# Altium PCB 电源控制板.PcbDoc
Units mm, origin at the board's own origin, x right, y up, seen from the top; angles counter-clockwise.
Board outline 96.52 x 68.58 mm, 2 copper layers (Top Layer, Bottom Layer), stack 0.533 mm thick; 40 components, 30 nets, 215 pads, 30 vias.
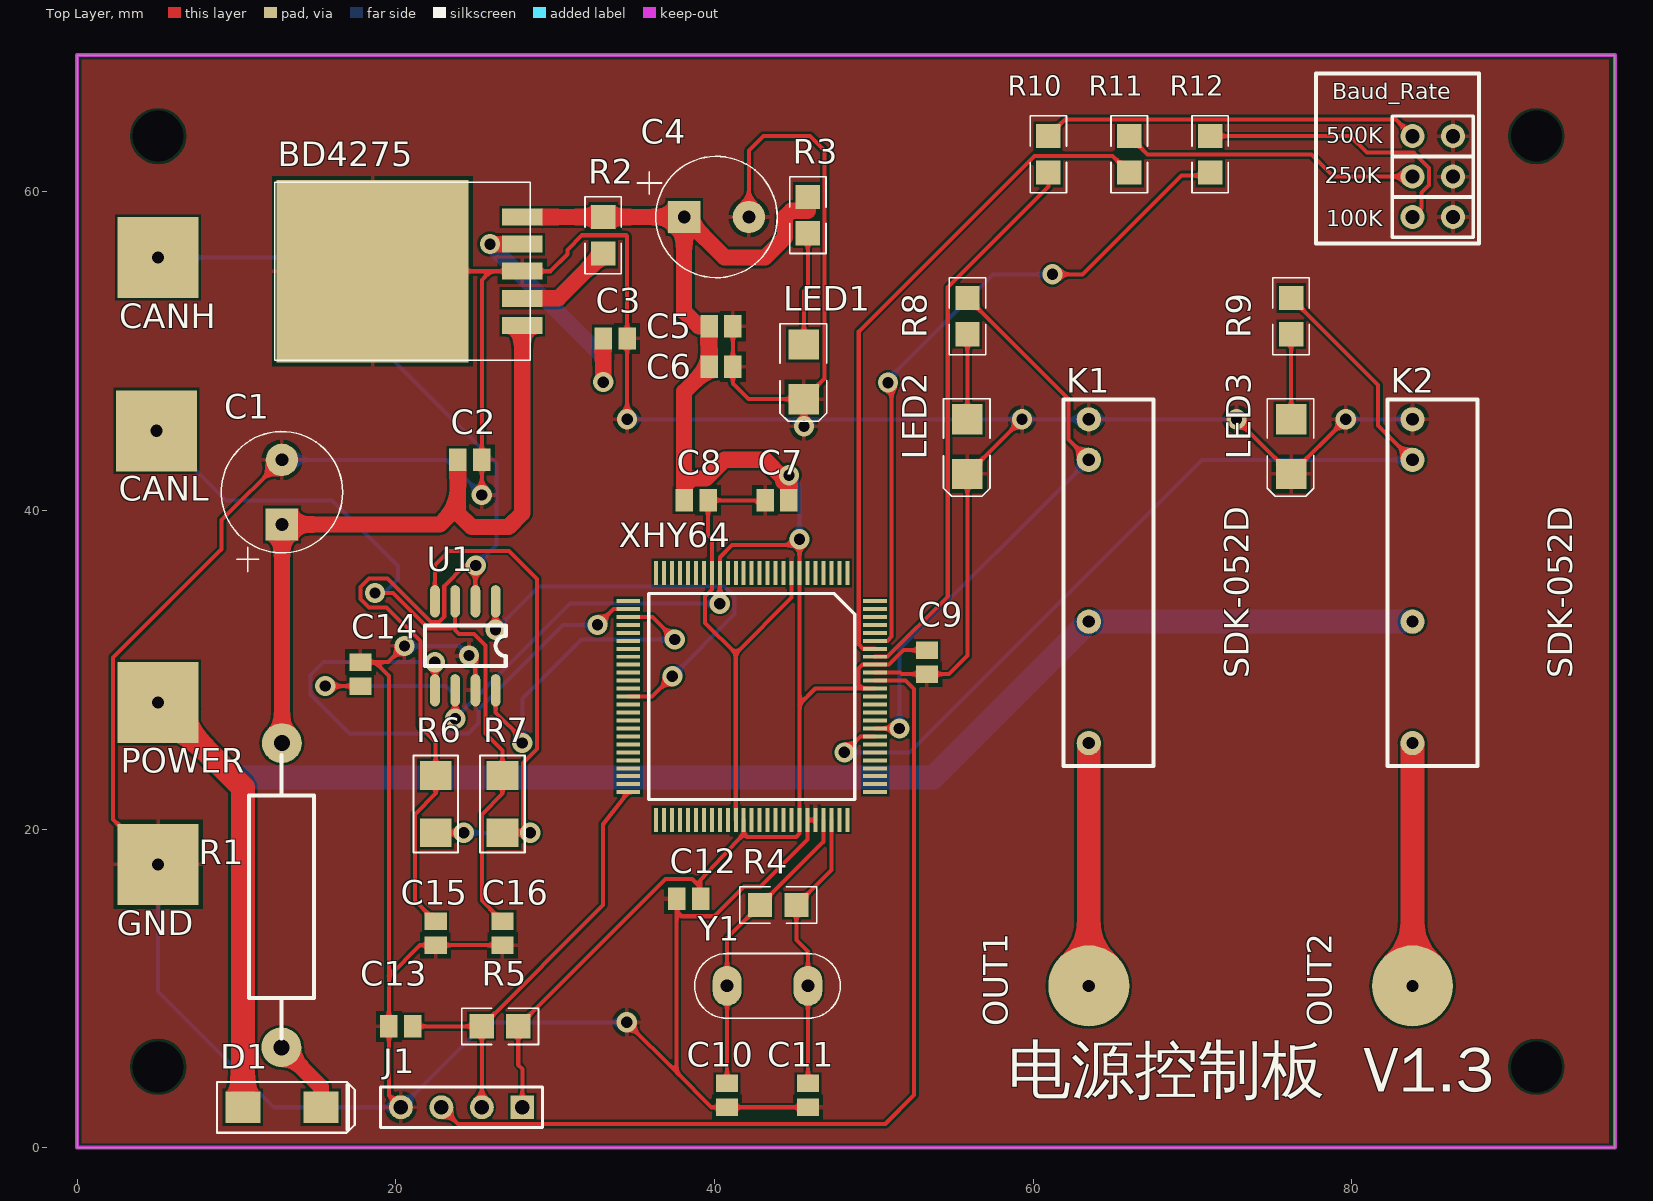
[diagram p0: Top Layer view]
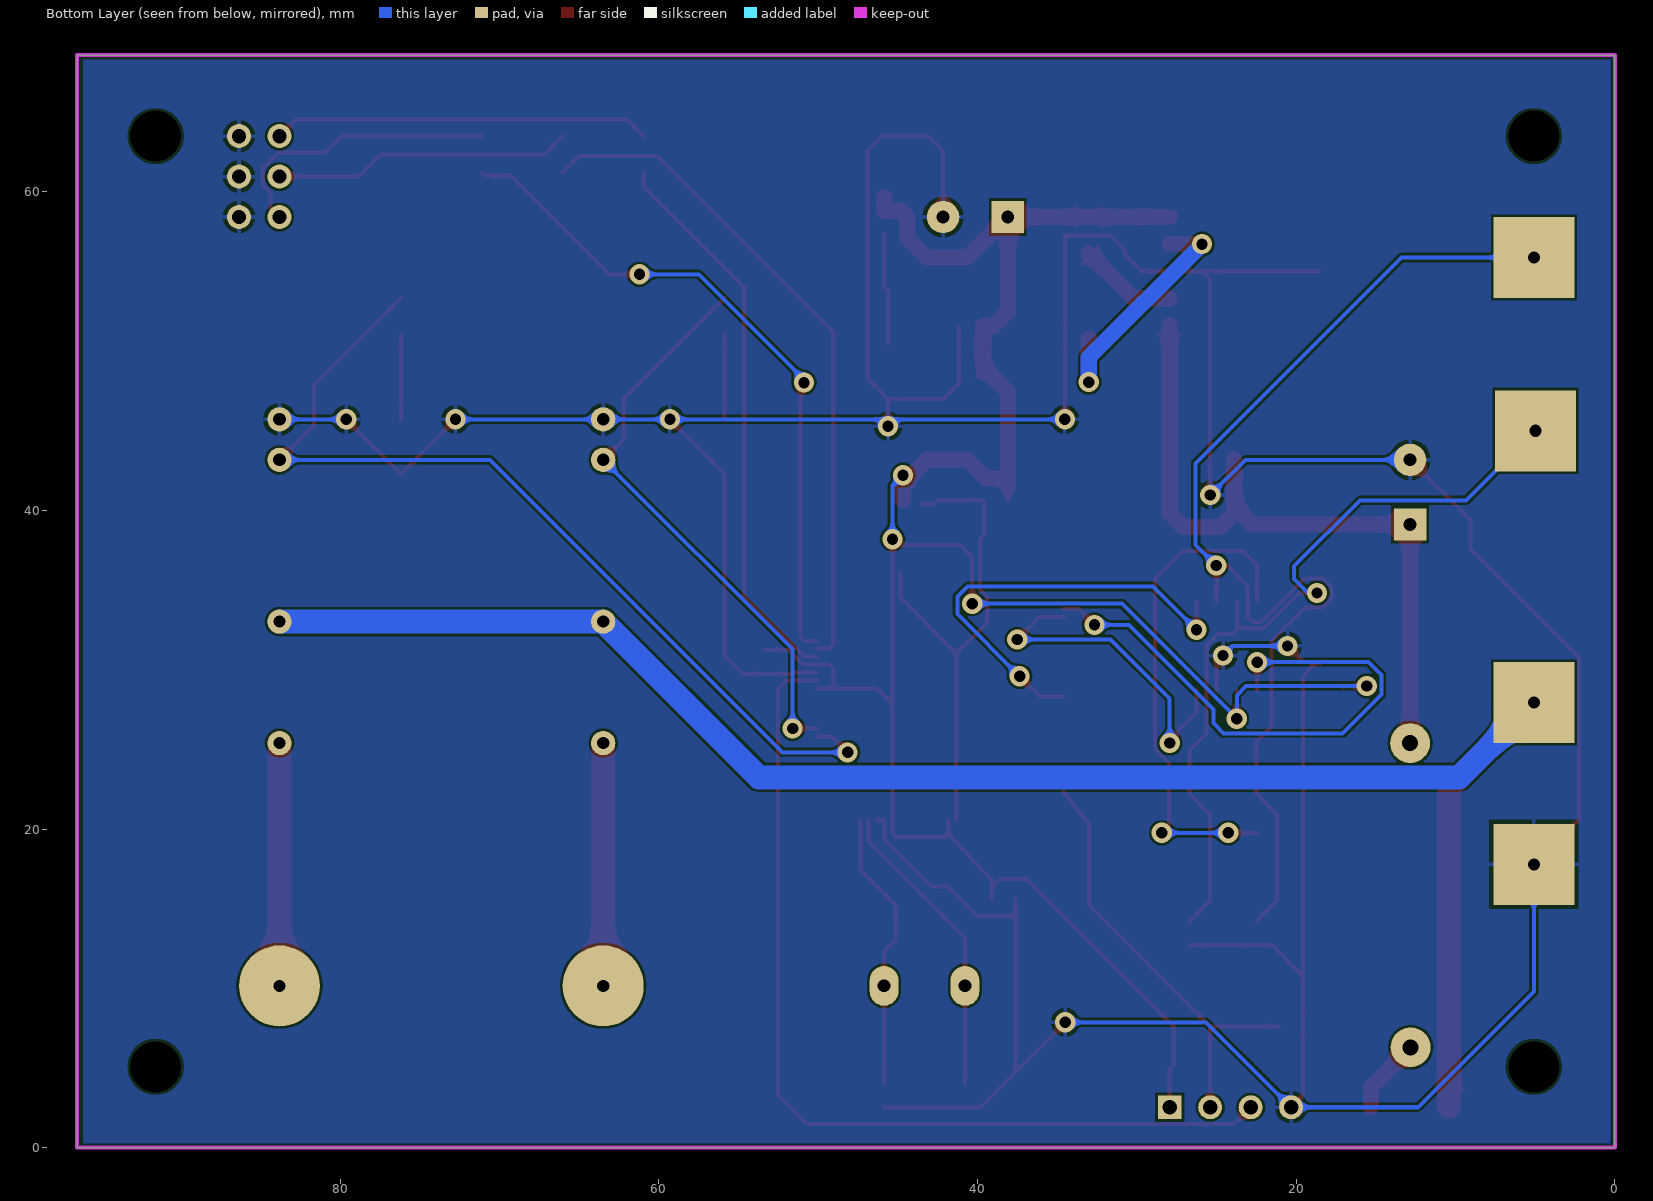
[diagram p1: Bottom Layer view, seen from below]

## Layer stack, top to bottom
Top Solder: solder mask 0.0102, Solder Resist, Dk 3.5
Top Layer: signal copper 0.0356
Dielectric 2: prepreg 0.0711, PP-006, Dk 4.1
Dielectric 3: prepreg 0.0711, PP-006, Dk 4.1
Dielectric 1: dielectric 0.32, FR-4, Dk 4.8
Bottom Layer: signal copper 0.0356
Bottom Solder: solder mask 0.0102, Solder Resist, Dk 3.5

## Board outline
0,68.58 96.52,68.58 96.52,0 0,0

## Design rules (kind name [scope] priority, off if disabled: settings)
Clearance [All] p1: gap=0.152 ignorepadtopadclearanceinfootprint=TRUE
HoleSize [All] p1: absolutevalues=TRUE maxlimit=3.81 minlimit=0.025 maxpercent=80.000 minpercent=20.000
HoleToHoleClearance [All] p1: gap=0.127 allowstackedmicrovias=TRUE
MinimumSolderMaskSliver [All] p1: minsoldermaskwidth=0.025
PolygonConnect [All] p1: connectstyle=Relief reliefconductorwidth=0.254 reliefentries=4 polygonreliefangle="90 Angle" airgapwidth=0.254
RoutingLayers RoutingLayers_1 [All] p1: top layer_v5=TRUE bottom layer_v5=TRUE
RoutingPriority [InNet('GND')] p1: routingpriority=0
RoutingVias [All] p1: holewidth=0.711 width=1.27 viastyle="Through Hole" minholewidth=0.711 minwidth=1.27 maxholewidth=0.711 maxwidth=1.27
SilkToSilkClearance [All] p1: silktosilkclearance=0.127
SilkToSolderMaskClearance [IsPad] p1: minsilkscreentomaskgap=0.102 clearancetoexposedcopper=TRUE
SolderMaskExpansion [All] p1: expansion=0.102
Width Width_1 [InNet('VCC13V')] p1: maxlimit=2.032 minlimit=1.5 preferedwidth=1.5
Width Width_2 [InNet('VCC13V_OUT1')] p2: maxlimit=2.032 minlimit=1.5 preferedwidth=1.5 minimp=50.000000 maximp=50.000000 favimp=50.000000
Width Width_3 [InNet('VCC13V_OUT2')] p3: maxlimit=2.032 minlimit=1.5 preferedwidth=1.5 minimp=50.000000 maximp=50.000000 favimp=50.000000
Width Width_4 [InNet('NetD1_2')] p4: maxlimit=2.032 minlimit=1.016 preferedwidth=1.016 minimp=50.000000 maximp=50.000000 favimp=50.000000
Width Width_5 [InNet('NetBD4275_1')] p5: maxlimit=2.032 minlimit=1.016 preferedwidth=1.016 minimp=50.000000 maximp=50.000000 favimp=50.000000
Width Width_6 [InNet('NetBD4275_2')] p6: maxlimit=2.032 minlimit=1.016 preferedwidth=1.016 minimp=50.000000 maximp=50.000000 favimp=50.000000
Width Width_7 [InNet('NetBD4275_4')] p7: maxlimit=2.032 minlimit=1.016 preferedwidth=1.016 minimp=50.000000 maximp=50.000000 favimp=50.000000
Width Width_8 [InNet('VCC5V0')] p8: maxlimit=2.032 minlimit=0.254 preferedwidth=0.254 minimp=50.000000 maximp=50.000000 favimp=50.000000
Width Width_9 [All] p9: maxlimit=0.254 minlimit=0.254 preferedwidth=0.254
23 further rules are at their usual default settings.

## Classes and differential pairs
component class 电源控制板: BD4275 C1 C2 C3 C4 C5 C6 C7 C8 C9 C10 C11 C12 C13 C14 C15 C16 D1 J1 K1 K2 LED1 LED2 LED3 R2 R3 R4 R5 R6 R7 R8 R9

## Components (designator, comment, footprint, x,y, rotation, side; value= is the part's Value field where it differs from the comment)
Baud_Rate "Comment" BAUD_RATE 87.63,57.15 r90 top
BD4275 "BD4275" TO-263 27.179,55.029 r0 top
C1 "100UF/50V" RB.1/.25 12.852,39.116 r90 top
C2 "104" C0805 24.65,43.18 r180 top value=50V-104-0805
C3 "104" C0805 33.77,50.8 r180 top value=50V-104-0805
C4 "470UF/16V" RB.1/.25 38.1,58.42 r0 top
C5 "104" C0805 40.411,51.562 r180 top value=50V-104-0805
C6 "104" C0805 40.411,49.022 r180 top value=50V-104-0805
C7 "104" C0805 43.93,40.64 r180 top value=50V-104-0805
C8 "104" C0805 38.85,40.64 r0 top value=50V-104-0805
C9 "104" C0805 53.34,30.48 r90 top value=50V-104-0805
C10 "22P" C0805 40.792,3.29 r90 top value=50V-22P-0805
C11 "22P" C0805 45.872,3.29 r270 top value=50V-22P-0805
C12 "104" C0805 38.379,15.621 r180 top value=50V-104-0805
C13 "104" C0805 20.32,7.62 r0 top value=50V-102-0805
C14 "104" C0805 17.78,29.73 r270 top value=50V-104-0805
C15 "47P-100V" C0805 22.504,13.462 r90 top value=100V-47P-0805
C16 "47P-100V" C0805 26.695,13.462 r90 top value=100V-47P-0805
D1 "M7" M7-A 12.852,2.54 r0 top
J1 "SPI4" HDR1X4 27.94,2.54 r180 top
K1 "SDK-052D" SDK-052D 63.5,45.72 r0 top
K2 "SDK-052D" SDK-052D 83.82,45.72 r0 top
LED1 "R" 1206-2 45.618,46.99 r90 top
LED2 "R" 1206-2 55.88,42.291 r90 top
LED3 "R" 1206-2 76.2,42.291 r90 top
R1 "Comment" 2WR 12.822,25.905 r90 top
R2 "4K7" 0805 33.03,56.141 r90 top value="4K7-0805- 5%"
R3 "510Ω" 0805_2 45.872,57.404 r90 top value="510-0805- 5%"
R4 "1M" 0805 45.142,15.24 r180 top value=1M-0805-5%
R5 "10K" 0805 25.407,7.61 r0 top value=10K-0805-5%
R6 "62R-J" 1206 22.504,21.568 r90 top value=62R-1206-1%
R7 "62R-J" 1206 26.695,21.568 r90 top value=62R-1206-1%
R8 "1KΩ" 0805_2 55.89,51.061 r90 top value="1KΩ-0805- 5%"
R9 "1KΩ" 0805_2 76.21,51.061 r90 top value="1KΩ-0805- 5%"
R10 "Comment" 0805 60.97,61.221 r90 top
R11 "Comment" 0805 66.05,61.221 r90 top
R12 "Comment" 0805 71.13,61.221 r90 top
U1 "Comment" SO-8 24.409,33.274 r90 top
XHY64 "XHY64" QUAD100 48.34,36.068 r270 top
Y1 "Comment" 16M 40.792,10.16 r90 top

## Footprints (in the part's own frame and the unit in brackets; to place one, negate y for a bottom-side part, rotate by r counter-clockwise, add the part's x,y. Pads: shape width x height; smd on the part's side, far side on the other; paste and mask are expansions set on the pad)
2WR [mm]
  round 2.5 hole 1: 1(-0.505,-0.031) 2(-19.604,0)
  silkscreen extent -19.05,-2.03 -1.27,2.03
16M [mm]
  oval 2.5x1.8 hole 0.8: 12(0,0) 13(0,-5.08)
  silkscreen extent -2.03,-7.11 2.03,2.03
0805 [mil]
  rect 60x60 smd: 1(-0.28,0.39) 2(89.72,0.39)
  silkscreen extent -50,-45 140,45
0805_2 [mil]
  rect 60x60 smd: 1(-0.28,0.39) 2(89.72,0.39)
  silkscreen extent -50,-45 140,45
1206 [mm]
  rect 1.8x2 smd: 1(-1.8,0) 2(1.8,0)
  silkscreen extent -3.05,-1.4 3.05,1.4
1206-2 [mil]
  rect 75x75 smd: 5(135,0) 6(0,0)
  silkscreen extent -55,-56 186,59
BAUD_RATE [mm]
  round 1.5 hole 0.9: 1(6.35,3.81) 2(6.35,1.27) 3(3.81,3.81) 4(3.81,1.27) 5(1.27,3.81) 6(1.27,1.27)
  silkscreen extent 0,0 7.62,5.08
C0805 [mm] "Chip Capacitor, Body 2.0x1.3mm, IPC High Density"
  rect 1.1x1.4 smd: 1(-0.75,0) 2(0.75,0)
  body extent -1.1,-0.72 1.1,0.72, height 1.4
HDR1X4 [mm] "Connector; Header; 4 Position"
  rect 1.5x1.5 hole 0.9: 1(0,0)
  round 1.5 hole 0.9: 2(2.54,0) 3(5.08,0) 4(7.62,0)
  silkscreen extent -1.27,-1.27 8.89,1.27
M7-A [mm]
  rect 2.2x2 smd: 1(-2.45,0) 2(2.45,0)
  silkscreen extent -4.06,-1.6 4.57,1.6
QUAD100 [mm]
  rect 1.5x0.25 smd: 1(0,0) 2(0,-0.5) 3(0,-1) 4(0,-1.5) 5(0,-2) 6(0,-2.5) 7(0,-3) 8(0,-3.5) 9(0,-4) 10(0,-4.5) 11(0,-5) 12(0,-5.5) 13(0,-6) 14(0,-6.5) 15(0,-7) 16(0,-7.5) 17(0,-8) 18(0,-8.5) 19(0,-9) 20(0,-9.5) 21(0,-10) 22(0,-10.5) 23(0,-11) 24(0,-11.5) 25(0,-12) 51(15.5,-12) 52(15.5,-11.5) 53(15.5,-11) 54(15.5,-10.5) 55(15.5,-10) 56(15.5,-9.5) 57(15.5,-9) 58(15.5,-8.5) 59(15.5,-8) 60(15.5,-7.5) 61(15.5,-7) 62(15.5,-6.5) 63(15.5,-6) 64(15.5,-5.5) 65(15.5,-5) 66(15.5,-4.5) 67(15.5,-4) 68(15.5,-3.5) 69(15.5,-3) 70(15.5,-2.5) 71(15.5,-2) 72(15.5,-1.5) 73(15.5,-1) 74(15.5,-0.5) 75(15.5,0)
  rect 0.25x1.5 smd: 26(1.75,-13.75) 27(2.25,-13.75) 28(2.75,-13.75) 29(3.25,-13.75) 30(3.75,-13.75) 31(4.25,-13.75) 32(4.75,-13.75) 33(5.25,-13.75) 34(5.75,-13.75) 35(6.25,-13.75) 36(6.75,-13.75) 37(7.25,-13.75) 38(7.75,-13.75) 39(8.25,-13.75) 40(8.75,-13.75) 41(9.25,-13.75) 42(9.75,-13.75) 43(10.25,-13.75) 44(10.75,-13.75) 45(11.25,-13.75) 46(11.75,-13.75) 47(12.25,-13.75) 48(12.75,-13.75) 49(13.25,-13.75) 50(13.75,-13.75) 76(13.75,1.75) 77(13.25,1.75) 78(12.75,1.75) 79(12.25,1.75) 80(11.75,1.75) 81(11.25,1.75) 82(10.75,1.75) 83(10.25,1.75) 84(9.75,1.75) 85(9.25,1.75) 86(8.75,1.75) 87(8.25,1.75) 88(7.75,1.75) 89(7.25,1.75) 90(6.75,1.75) 91(6.25,1.75) 92(5.75,1.75) 93AD(5.25,1.75) 94AD(4.75,1.75) 95AD(4.25,1.75) 96AD(3.75,1.75) 97AD(3.25,1.75) 98AD(2.75,1.75) 99AD(2.25,1.75) 100AD(1.75,1.75)
  silkscreen extent 1.28,-12.46 14.21,0.47
RB.1/.25 [mil]
  rect 80x80 hole 31.5: 1(0,0)
  round 80 hole 31.5: 2(160,0)
  silkscreen extent -116,-150 230,150
SDK-052D [mil]
  round 60 hole 30: 1(0,-500) 2(0,-800)
  round 60 hole 31.5: 3(0,-100) 4(0,0)
  silkscreen extent -62,-856 160,49
SO-8 [mil]
  oval 80x24 smd: 1(-179.75,-73.19) 2(-179.75,-23.19) 3(-179.75,26.81) 4(-179.75,76.81) 5(40.25,76.81) 6(40.25,26.81) 7(40.25,-23.19) 8(40.25,-73.19)
  silkscreen extent -120,-98 -20,102
TO-263 [mil]
  rect 475x450 smd: 0(-340.03,-0.5)
  rect 100x42 smd: 1(29.97,-134.5) 2(29.97,-67.49) 3(29.97,-0.49) 4(29.97,66.5) 5(29.97,133.51)
  silkscreen extent -582,-220 50,220

## Part data
C1: library part C470UF035S, "100UF      50V"
C2 C3 C5 C6 C7 C8 C9 C12 C14: library part C104_0805, "104     50V        10%   C0805"
C4: library part C470UF016S, "100UF      50V      CD10X10D5"
C10 C11: library part C22P_0805, "22P     50V        10%   C0805"
C13: library part C102_0805, "104     50V        10%   C0805"
C15 C16: library part C47P_100V_0805, "47P    100V        10%   C0805"
D1: library part TVS
J1: library part "Header 4", "单排针，Header, 4-Pin", LatestRevisionDate=17-Jul-2002, LatestRevisionNote="Re-released for DXP Platform.", Publisher="Altium Limited"
K1 K2: library part Relay-SPST, LatestRevisionDate=17-Jul-2002, LatestRevisionNote="Re-released for DXP Platform.", PackageReference=MODULE4, Published=24-Mar-1999, Publisher="Altium Limited"
LED1 LED2 LED3: library part LED_R, "LED_R"
R1: library part R8R22W, "8R2                                2W"
R2: library part R4K7_0805_5%, "4K7     1/8W    5%   R0805"
R3: library part R4K7_0805_5%, "510Ω    5%   R0805"
R4: library part R1M_0805_5%, "1M    1/8W    5%   R0805"
R5: library part R10K_0805_5%, "10K     1/8W    5%   R0805"
R6 R7: library part R62R_1206_1%, "62R    1/4W     1%   R1206"
R8 R9: library part R4K7_0805_5%, "1KΩ    5%   R0805"
R10 R11 R12: "330Ω"
U1: library part TJA1042, "CAN驱动?"
Y1: library part XTAL, "晶体，4M"

## Free pads (board coordinates)
  rect 5.08x5.08 all layers, no hole: 1(5.08,17.78) 1(5.08,55.88) 8(5.08,27.94) 12(4.975,45)
  round 1.524 hole 3.2: 1(5.08,63.5) 2(5.08,5.08) 3(91.592,5.08) 4(91.592,63.5)
  round 1.524 on Drill Drawing: 2(5.08,5.08)
  round 1.524 hole 0.762: 2(5.08,17.78) 2(5.08,55.88) 5(5.08,27.94) 9(4.975,45) 18(63.5,10.16) 18(83.82,10.16)
  round 5.08 all layers, no hole: 20(63.5,10.16) 20(83.82,10.16)

## Via types
v1: diameter 1.27, hole 0.711, Top Layer to Bottom Layer, 30 vias

## Nets (pads, with @x,y where several pads share a name; then routed paths per layer and width w, separated by ;. In a path a pad name is that pad's centre, name@x,y a point inside that pad or via, vN(x,y) a via of type N, cw(c..) or ccw(c..) an arc to the next point about the centre after c; other vN are vias at no path point)
93AD: R10.1 XHY64.93AD | length 35.3
  Top Layer w0.254: XHY64.93AD 50.092,30.82 50.863,30.82 54.648,34.606 54.648,54.027 60.96,60.339 R10.1
94AD: R11.1 XHY64.94AD | length 42.8
  Top Layer w0.254: XHY64.94AD 50.088,31.32 49.318,31.32 49.061,31.577 49.061,51.234 60.082,62.255 64.999,62.255 R11.1
95AD: R12.1 XHY64.95AD | length 42.8
  Top Layer w0.254: XHY64.95AD 50.092,31.82 50.863,31.82 51.12,32.077 51.12,47.53 50.9,47.75 v1(50.9,48.025) ; v1(61.225,54.825) 63.115,54.825 69.315,61.025 70.931,61.025 R12.1
  Bottom Layer w0.254: v1@50.825,48.15 57.5,54.825 v1@61.15,54.825
CAN_H: C15.2 pad.1@5.08,55.88 pad.2@5.08,55.88 R6.2 U1.7 | length 71.6
  Top Layer w0.254: C15.2 21.209,15.507 21.209,20.93 22.504,22.225 R6.2 22.504,25.476 21.539,26.441 21.539,31.793 19.421,33.911 18.321,33.911 17.786,34.446 17.786,35.204 18.321,35.739 19.478,35.739 22.216,33.001 22.7,33.001 23.043,33.343 23.043,35.266 24.327,36.551 24.998,36.551 24.998,36.53 24.998,36.068 v1@24.998,36.063 ; v1@24.994,36.068 v1@24.998,36.063 ; U1.7 v1@24.998,36.063
  Bottom Layer w0.254: pad.1@5.08,55.88 12.116,55.88 13.386,55.88 26.314,42.951 26.314,41.681 26.314,37.846 v1(25.019,36.551)
CAN_L: C16.2 pad.9 pad.12 R7.2 U1.6 | length 50.2
  Top Layer w0.254: v1(18.7,34.825) 19.818,34.825 22.048,32.595 22.869,32.595 22.874,32.6 23.45,32.6 23.65,32.8 23.725,32.8 23.725,32.5 23.975,32.25 24.9,32.25 25.629,31.521 25.629,26.01 26.695,24.943 R7.2 26.695,22.225 25.4,20.93 25.4,15.507 C16.2 ; 23.728,32.8 U1.6
  Bottom Layer w0.254: pad.12 9.338,40.637 16.005,40.637 20.125,36.517 20.125,35.7 19.25,34.825 v1(18.7,34.825)
CAN_唤醒: U1.4 XHY64.27 | length 35.8
  Top Layer w0.254: v1(22.454,30.48) 22.458,30.475 U1.4 ; v1(32.664,32.817) 33.666,33.818 XHY64.27
  Bottom Layer w0.254: v1(22.454,30.48) 15.469,30.48 14.656,29.667 14.656,28.448 17.094,26.01 24.562,26.01 25.197,26.645 25.197,27.508 30.505,32.817 v1(32.664,32.817)
GND: Baud_Rate.2 Baud_Rate.4 Baud_Rate.6 BD4275.0 BD4275.3 C1.2 C2.1 C3.1 C4.2 C5.1 C6.1 C7.2 C8.2 C9.1 C10.1 C11.2 C12.2 C13.1 C14.1 C15.1 C16.1 J1.4 K1.4 K2.4 LED1.6 LED2.6 LED3.6 pad.1@5.08,17.78 pad.2@5.08,17.78 U1.2 XHY64.8 XHY64.18 XHY64.61 XHY64.70 XHY64.71 XHY64.91 | length 355.7
  Top Layer w0.254: pad.2@5.08,17.78 2.261,20.599 2.261,30.759 9.068,37.567 9.068,39.395 C1.2 ; C14.1 18.694,30.48 ; BD4275.0 25.959,55.016 ; J1.4 19.57,3.29 C13.1 19.57,10.756 ; v1(20.543,31.496) 19.527,30.48 18.694,30.48 ; v1(24.592,30.893) 24.998,30.486 U1.2 ; v1(25.4,40.97) C2.1 25.4,54.458 25.959,55.016 ; C16.1 C15.1 21.526,12.712 19.57,10.756 ; v1(34.493,7.874) 37.629,4.738 ; v1(34.52,45.72) C3.1 34.52,57.225 34.468,57.277 31.699,57.277 30.785,56.363 30.785,56.083 29.718,55.016 BD4275.3 25.959,55.016 ; C12.2 37.629,14.834 ; C5.1 C6.1 41.161,47.955 42.127,46.99 LED1.6 ; XHY64.61 41.34,31.028 ; C4.2 42.164,62.586 43.078,63.5 45.999,63.5 46.914,62.586 46.914,48.285 LED1.6 ; C7.2@43.428,40.392 42.793,40.392 42.545,40.64 C8.2 39.6,38.467 39.84,38.227 XHY64.18 39.84,35.027 39.421,34.607 39.421,32.948 41.34,31.028 ; XHY64.8 44.84,34.528 41.34,31.028 ; v1(45.618,45.288) LED1.6 ; C11.2 C10.1 39.827,2.54 37.629,4.738 ; XHY64.71 XHY64.70 45.84,19.355 42.894,16.408 41.859,16.408 39.98,14.529 37.934,14.529 37.629,14.834 ; XHY64.91 51.664,29.818 51.752,29.73 C9.1 54.724,29.73 55.88,30.886 LED2.6 v1(59.309,45.72) ; v1(72.771,45.72) LED3.6 v1(79.629,45.72) ; 18.694,30.48 19.57,29.604 19.57,10.756 ; 37.629,4.738 37.629,14.834
  Bottom Layer w0.254: pad.2@5.08,17.78 5.08,9.804 12.344,2.54 J1.4 25.654,7.874 v1(34.493,7.874) ; C1.2 23.19,43.18 v1(25.4,40.97) ; v1(20.543,31.496) 23.989,31.496 v1(24.592,30.893) ; v1(34.52,45.72) v1@46.05,45.72 ; v1(45.618,45.288) v1@46.05,45.72 ; v1(72.771,45.72) K1.4 v1(59.309,45.72) v1@46.05,45.72 ; v1(79.629,45.72) K2.4
NetBD4275_1: BD4275.1 C1.1 C2.2 R1.1 | length 45.1
  Top Layer w1.016: R1.1 C1.1 22.758,39.116 23.9,40.258 ; C2.2 23.9,40.258 ; BD4275.1 27.94,39.827 27.076,38.964 24.764,38.964 23.9,39.827 23.9,40.258
NetBD4275_2: BD4275.2 R2.1 | length 6.2
  Top Layer w1.016: BD4275.2 30.201,53.315 R2.1
NetBD4275_4: BD4275.4 C3.2 | length 16.4
  Top Layer w1.016: v1(25.91,56.718) BD4275.4 ; v1(33.02,48.057) C3.2
  Bottom Layer w1.016: v1(25.91,56.718) 33.02,49.608 v1(33.02,48.057)
NetD1_2: D1.2 R1.2 | length 4.8
  Top Layer w1.016: R1.2 15.302,3.821 D1.2
NetLED1_1: LED1.5 R3.1 | length 7.1
  Top Layer w0.254: LED1.5 45.618,53.772 45.863,54.016 R3.1
NetLED2_1: LED2.5 R8.1 | length 5.3
  Top Layer w0.254: LED2.5 55.88,48.362 R8.1
NetLED3_1: LED3.5 R9.1 | length 5.3
  Top Layer w0.254: LED3.5 76.2,48.362 R9.1
NetR6_1: R6.1 R7.1 U1.5 | length 33.9
  Top Layer w0.254: U1.5 22.458,36.576 23.347,37.465 27.102,37.465 28.854,35.712 28.854,25.021 27.991,24.158 27.991,20.218 v1(28.441,19.768) R7.1 ; R6.1 v1(24.266,19.768)
  Bottom Layer w0.254: v1(24.266,19.768) v1(28.441,19.768)
R10_1: Baud_Rate.1 R10.2 | length 23.7
  Top Layer w0.254: R10.2 62.001,64.541 82.779,64.541 Baud_Rate.1
R11_1: Baud_Rate.3 R11.2 | length 18.8
  Top Layer w0.254: R11.2 67.183,62.357 77.47,62.357 78.867,60.96 Baud_Rate.3
R12_1: Baud_Rate.5 R12.2 | length 18.1
  Top Layer w0.254: R12.2 79.908,63.5 80.95,62.459 83.896,62.459 84.849,61.505 84.849,60.415 84.379,59.944 84.379,58.979 Baud_Rate.5
TJA1040_STB: U1.8 XHY64.38 | length 28.1
  Top Layer w0.254: v1(26.264,32.512) 26.268,32.517 U1.8 ; XHY64.38 36.09,28.318 v1(37.363,29.591)
  Bottom Layer w0.254: v1(26.264,32.512) 28.981,35.23 40.64,35.23 41.275,34.595 41.275,33.503 v1(37.363,29.591)
TXCAN: U1.1 XHY64.28 | length 21.4
  Top Layer w0.254: U1.1 26.268,27.326 27.94,25.654 v1(27.94,25.4) ; XHY64.28 36.1,33.318 v1(37.516,31.902)
  Bottom Layer w0.254: v1(27.94,25.4) 27.94,28.194 31.648,31.902 v1(37.516,31.902)
VCC5V0: BD4275.5 C4.1 C5.2 C6.2 C7.1 C8.1 C9.2 C12.1 C14.2 J1.1 R2.2 R3.2 R5.2 U1.3 XHY64.7 XHY64.17 XHY64.62 XHY64.69 XHY64.89 XHY64.92 | length 157.9
  Top Layer w0.254: v1(15.57,28.98) C14.2 ; v1(23.728,26.93) U1.3 ; J1.1 27.94,4.953 27.686,5.207 R5.2 36.932,16.866 38.608,16.866 39.129,16.344 ; C8.1 38.1,41.529 ; C12.1 39.129,16.344 ; v1(40.34,34.15) XHY64.17 40.34,37.064 41.096,37.819 44.961,37.819 v1(45.34,38.199) XHY64.7 45.34,27.829 ; XHY64.62 41.84,19.71 ; v1@44.298,41.834 C7.1 ; XHY64.89 49.287,28.818 ; C9.2 51.864,31.23 50.952,30.318 XHY64.92 49.292,30.318 49.047,30.074 49.047,29.058 49.287,28.818 ; 39.129,16.344 39.129,16.803 41.84,19.71 ; 41.84,19.71 42.044,19.507 45.137,19.507 45.34,19.71 XHY64.69 45.34,27.829 ; 45.34,27.829 46.33,28.818 49.287,28.818
  Top Layer w1.016: BD4275.5 R2.2 C4.1 ; 43.18,55.88 40.64,55.88 C4.1 ; 43.203,55.903 44.44,57.14 44.44,58.433 44.827,58.819 45.862,58.819 R3.2 ; v1@44.298,41.834 44.298,42.062 43.18,43.18 40.64,43.18 39.46,42 38.571,42 38.1,41.529 38.1,47.461 C6.2 C5.2 39.014,51.562 38.1,52.476 C4.1 ; C7.1 v1(44.68,42.216)
  Bottom Layer w0.254: v1(15.57,28.98) 23.145,28.98 23.728,28.397 v1(23.728,26.93) 30.948,34.15 v1(40.34,34.15) ; v1(44.68,42.216) 45.34,41.556 v1(45.34,38.199)
VCC13V: D1.1 K1.1 K2.1 pad.5 pad.8 | length 112.3
  Top Layer w1.5: pad.5 10.402,22.618 D1.1
  Bottom Layer w1.5: pad.5 9.779,23.241 53.721,23.241 K1.1 K2.1
VCC13V_OUT1: K1.2 pad.18@63.5,10.16 pad.20@63.5,10.16 | length 15.2
  Top Layer w1.5: pad.20@63.5,10.16 K1.2
VCC13V_OUT2: K2.2 pad.18@83.82,10.16 pad.20@83.82,10.16 | length 15.2
  Top Layer w1.5: pad.20@83.82,10.16 K2.2
X1-1: K1.3 R8.2 XHY64.84 | length 36.6
  Top Layer w0.254: XHY64.84 51.609,26.318 v1(51.613,26.314) ; R8.2 62.23,46.99 62.23,44.45 K1.3
  Bottom Layer w0.254: v1(51.613,26.314) 51.613,31.293 K1.3
X1-2: K2.3 R9.2 XHY64.83 | length 58.9
  Top Layer w0.254: v1(48.158,24.816) 49.161,25.818 XHY64.83 ; R9.2 81.661,47.879 81.661,45.339 K2.3
  Bottom Layer w0.254: v1(48.158,24.816) 52.248,24.816 70.612,43.18 K2.3
X1_MCU: C10.2 R4.2 XHY64.72 Y1.12 | length 19
  Top Layer w0.254: C10.2 Y1.12 40.792,13.159 R4.2 46.84,19.207 XHY64.72
X2_MCU: C11.1 R4.1 XHY64.73 Y1.13 | length 17.7
  Top Layer w0.254: C11.1 Y1.13 45.872,12.319 45.149,13.042 R4.1 47.34,17.421 XHY64.73
编程1: C13.2 J1.2 R5.1 XHY64.50 | length 27.8
  Top Layer w0.254: C13.2 R5.1 ; J1.2 R5.1 ; XHY64.50 33.02,20.32 33.02,15.24 R5.1
编程2: J1.3 XHY64.90 | length 59
  Top Layer w0.254: J1.3 23.901,1.499 50.724,1.499 52.527,3.302 52.527,28.785 51.994,29.318 XHY64.90
pads on no net: XHY64.1 XHY64.2 XHY64.3 XHY64.4 XHY64.5 XHY64.6 XHY64.9 XHY64.10 XHY64.11 XHY64.12 XHY64.13 XHY64.14 XHY64.15 XHY64.16 XHY64.19 XHY64.20 XHY64.21 XHY64.22 XHY64.23 XHY64.24 XHY64.25 XHY64.26 XHY64.29 XHY64.30 XHY64.31 XHY64.32 XHY64.33 XHY64.34 XHY64.35 XHY64.36 XHY64.37 XHY64.39 XHY64.40 XHY64.41 XHY64.42 XHY64.43 XHY64.44 XHY64.45 XHY64.46 XHY64.47 XHY64.48 XHY64.49 XHY64.51 XHY64.52 XHY64.53 XHY64.54 XHY64.55 XHY64.56 XHY64.57 XHY64.58 XHY64.59 XHY64.60 XHY64.63 XHY64.64 XHY64.65 XHY64.66 XHY64.67 XHY64.68 XHY64.74 XHY64.75 XHY64.76 XHY64.77 XHY64.78 XHY64.79 XHY64.80 XHY64.81 XHY64.82 XHY64.85 XHY64.86 XHY64.87 XHY64.88 XHY64.96AD XHY64.97AD XHY64.98AD XHY64.99AD XHY64.100AD

## Polygon pours and split planes (outlines as drawn)
GND on Top Layer "GND_L01_P020" (solid, pour order 20): 0.25,68.375 96.125,68.3 96.125,68.25 96.125,0.25 0.25,0.25
no net on Top Layer "Top Layer-No Net" (solid, pour order 4): 25.273,126.873
no net on Top Layer "Top Layer-No Net 1" (solid, pour order 2): 25.4,127
no net on Top Layer "Top Layer-No Net 2" (solid, pour order 0): 25.4,127
no net on Top Overlay (solid): 0.25,68.375
GND on Bottom Layer "GND_L02_P022" (solid, pour order 22): 0.25,68.3 96.125,68.3 96.125,68.175 96.125,0.175 0.25,0.175

## Keep-outs
Keep-Out Layer:
  lines w0.254: 68.58,68.58 96.52,68.58 ; 96.52,68.58 96.52,0 0,0 0,68.58 96.52,68.58

## Silkscreen, mask and mechanical layers (free items; w line width, h text height)
Top Overlay:
  lines w0.254: 77.75,56.75 77.75,67.1 77.75,67.425 88,67.425 88,67.1 88,56.75 77.75,56.75
  text "500K" at 78.4,63.05 h1.02
  text "250K" at 78.3,60.525 h1.02
  text "100K" at 78.4,57.85 h1.02
  text "CANH" at 2.65,51.45 h1.52
  text "CANL" at 2.6,40.6 h1.52
  text "POWER" at 2.725,23.525 h1.52
  text "GND" at 2.5,13.35 h1.52
  text "OUT1" at 58.42,7.62 h1.52 r90
  text "OUT2" at 78.74,7.62 h1.52 r90
  text "电源控制板  V1.3" at 58.42,2.54 h5